# Altium PCB PCB1.PcbDoc
Units mm, origin at the board's own origin, x right, y up, seen from the top; angles counter-clockwise.
Board outline 150.27 x 119.51 mm, 2 copper layers (Top Layer, Bottom Layer); 61 components, 77 nets, 240 pads, 35 vias.
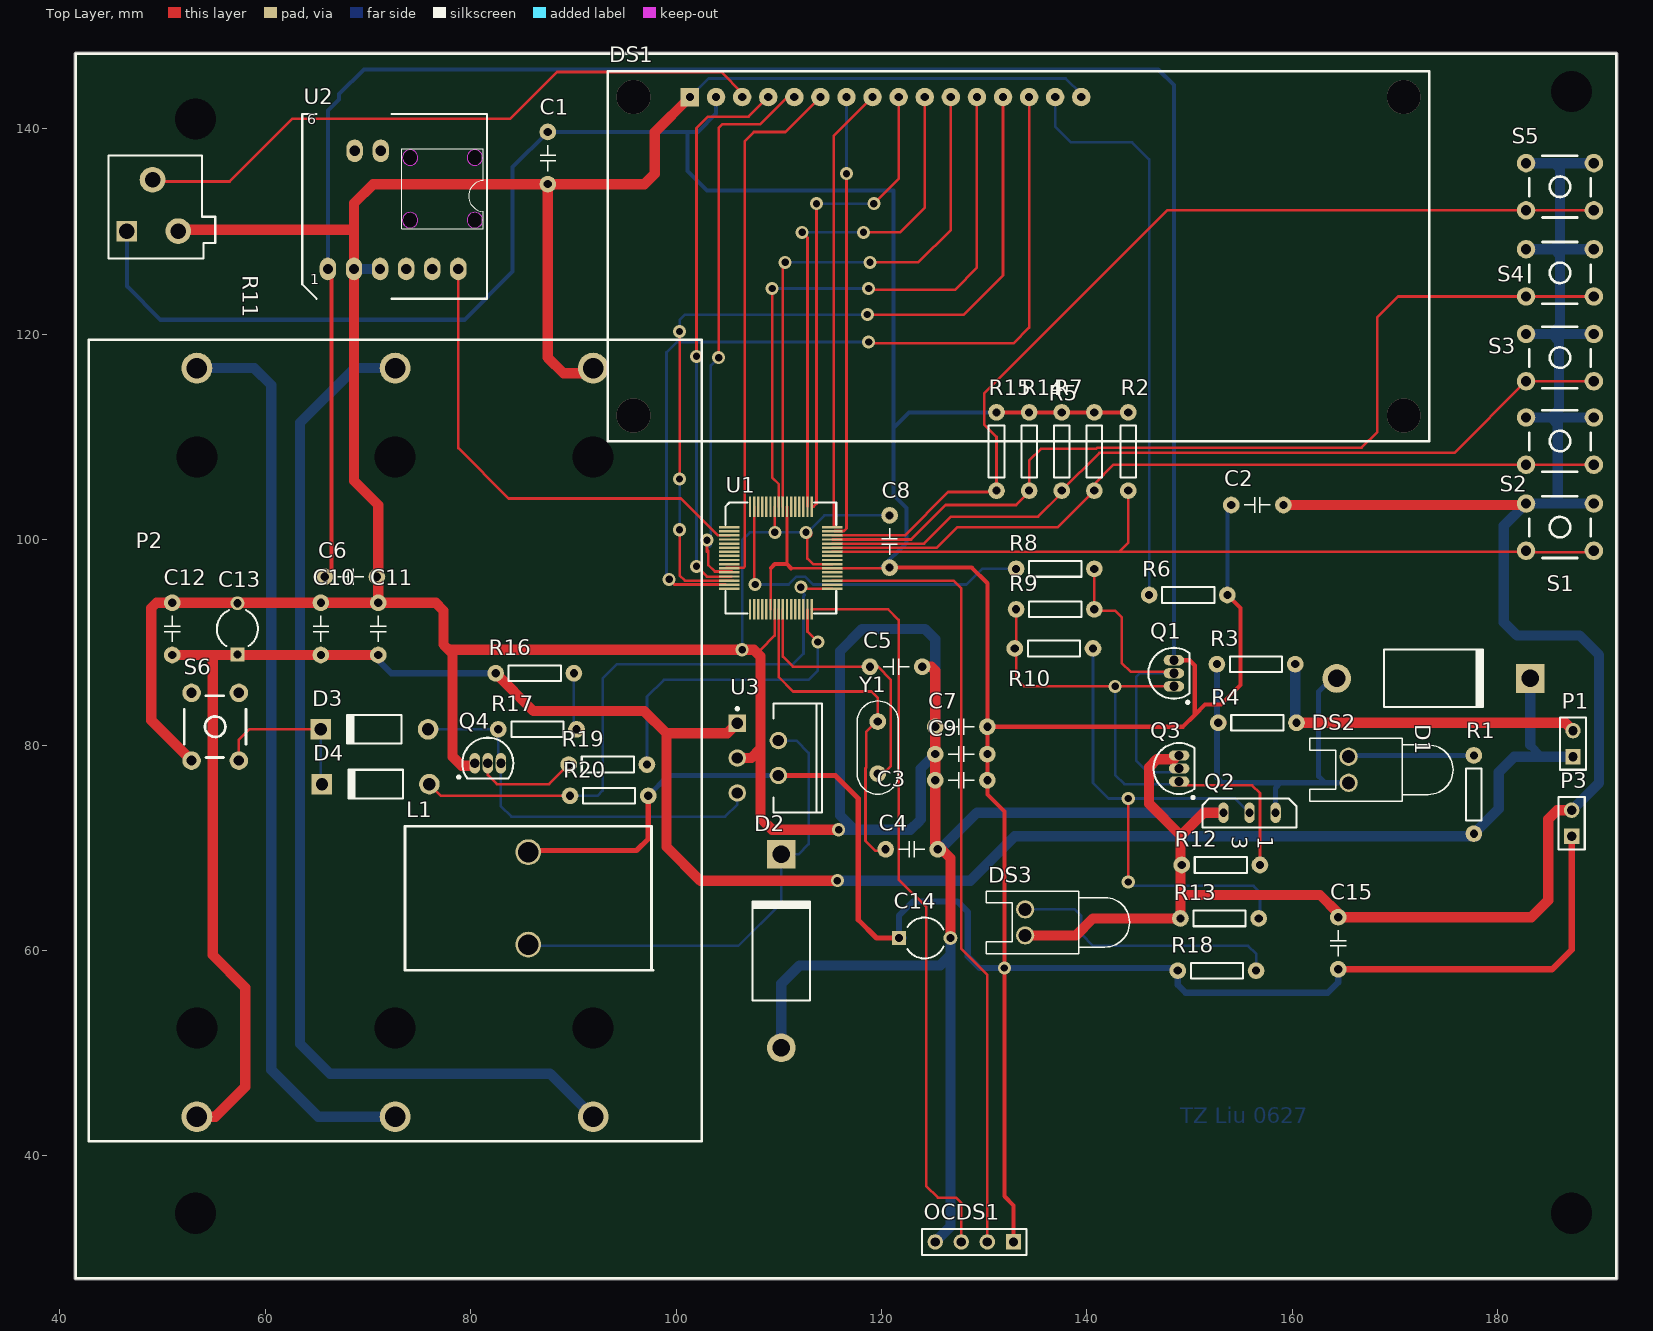
[diagram p0: Top Layer view]
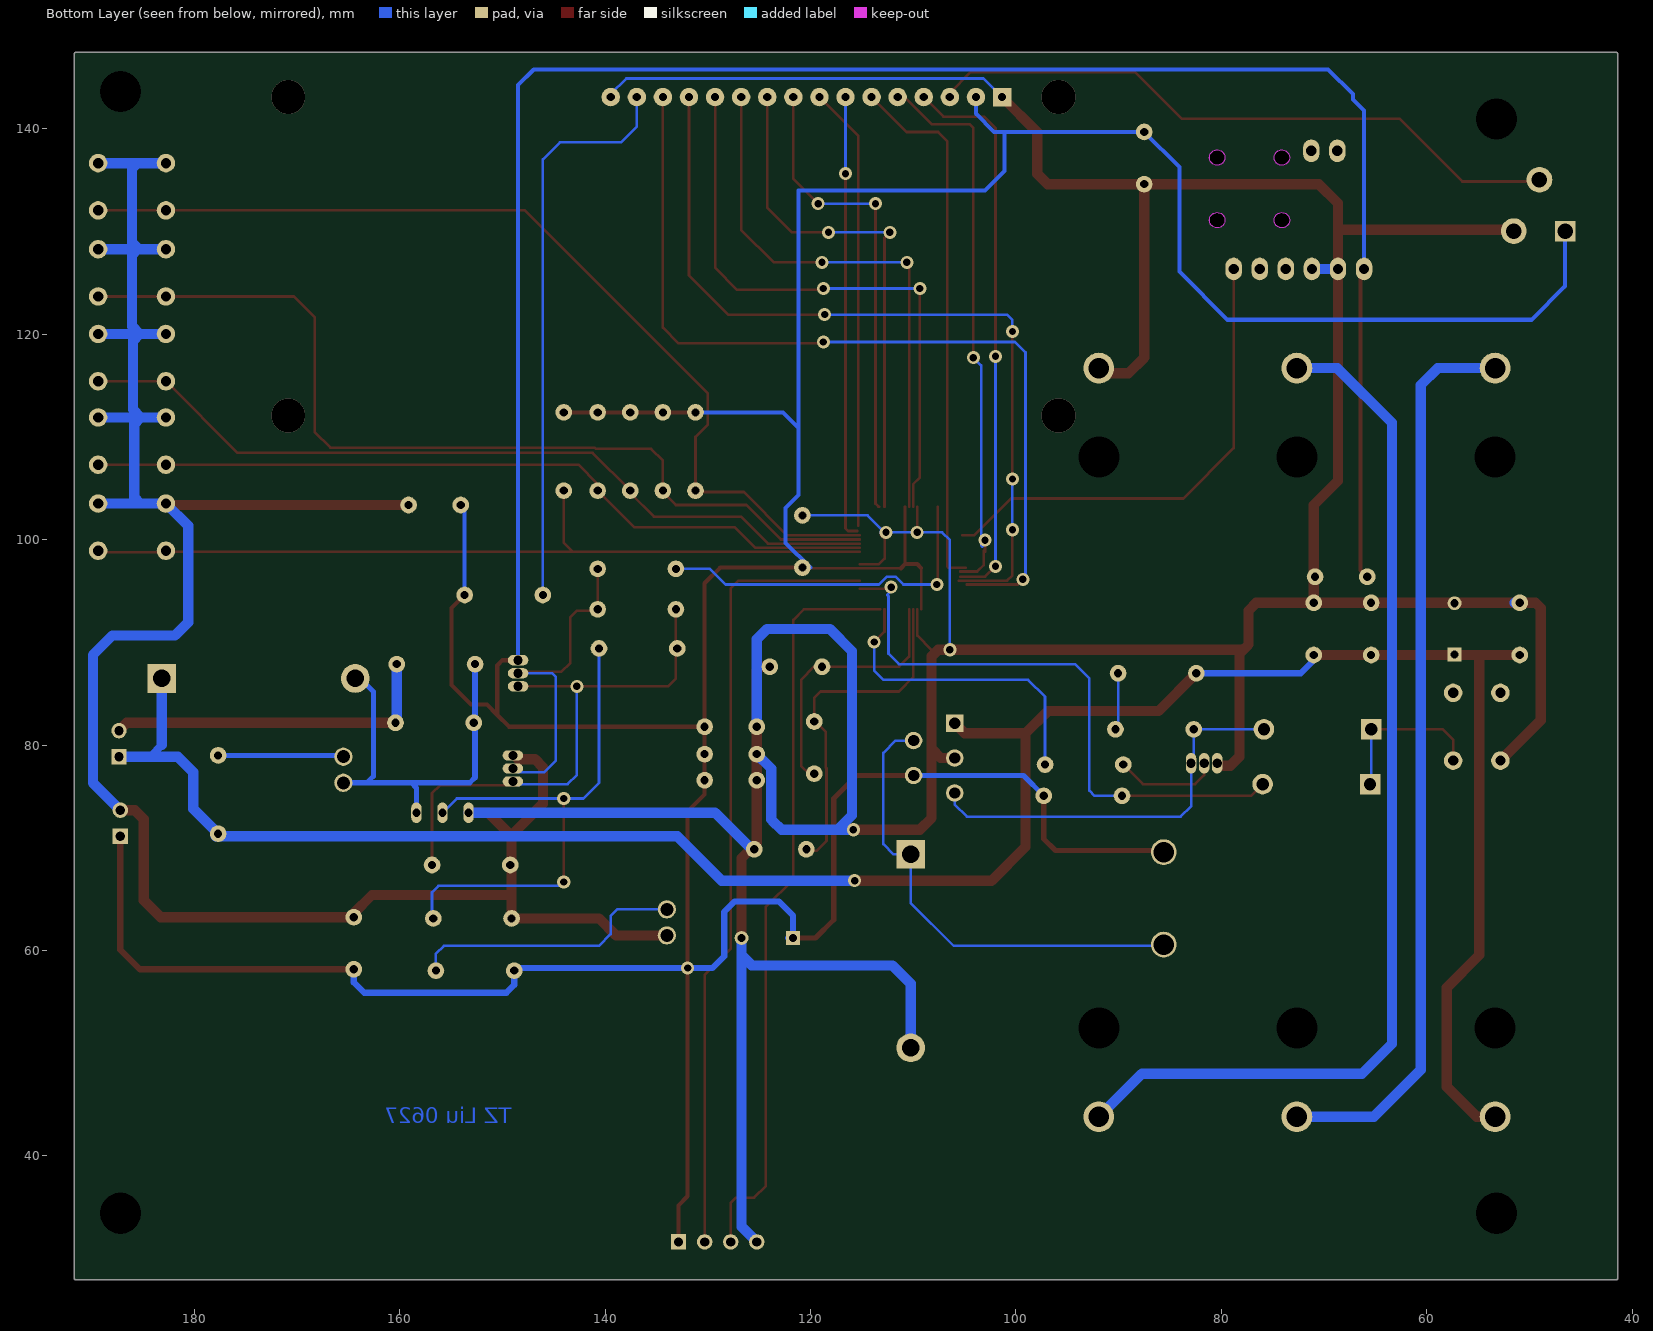
[diagram p1: Bottom Layer view, seen from below]

## Layer stack, top to bottom
Top Layer: signal copper 0.0356
Dielectric: dielectric 0.32, FR-4, Dk 4.8
Bottom Layer: signal copper 0.0356

## Board outline
41.529,27.94 cw(c41.529,28.067) 41.402,28.067 41.402,147.323 cw(c41.529,147.323) 41.529,147.45 191.473,147.45 cw(c191.473,147.323) 191.508,147.445 191.509,147.445 cw(c191.544,147.323) 191.671,147.323 191.671,28.067 cw(c191.544,28.067) 191.537,27.94 cw(c191.529,28.067) 191.529,27.94

## Design rules (kind name [scope] priority, off if disabled: settings)
Clearance [All] p1: gap=0.254
PolygonConnect [All] p1: connectstyle=Relief reliefconductorwidth=0.254 reliefentries=4 polygonreliefangle="90 Angle"
RoutingVias [All] p1: holewidth=0.711 width=1.27 viastyle="Through Hole" minholewidth=0.711 minwidth=1.27 maxholewidth=0.711 maxwidth=1.27
SilkscreenOverComponentPads [All] p1: minsilkscreentomaskgap=0.254
SolderMaskExpansion [All] p1: expansion=0.102
SupplyNets [All] p1: voltage=0.000
Width Width_1 [InNet('GND')] p1: maxlimit=1.2 minlimit=0.4 preferedwidth=1
Width [All] p2: maxlimit=0.75 minlimit=0.254 preferedwidth=0.6
27 further rules are at their usual default settings.

## Classes and differential pairs
component class Sheet1: C10 C11 C12 C13 C14 C15 D1 D2 D3 D4 DS2 DS3 L1 P1 P2 P3 Q1 Q2 Q3 Q4 R1 R2 R3 R4 R5 R7 R8 R9 R10 R12 R13 R14 R15 R16 R17 R18 R19 R20 S1 S2 S3 S4 S5 S6 U3
component class Sheet2: C1 C2 C3 C4 C5 C6 C7 C8 C9 DS1 OCDS1 R6 R11 U1 U2 Y1

## Components (designator, comment, footprint, x,y, rotation, side; value= is the part's Value field where it differs from the comment)
C1 "104" C200 87.503,137.16 r0 top
C2 "104" C200 156.591,103.378 r270 top
C3 "104" C200 127.762,76.581 r90 top
C4 "22p" C200 122.936,69.85 r270 top
C5 "22p" C200 121.412,87.63 r270 top
C6 "104" C200 68.326,96.393 r270 top
C7 "104" C200 127.762,81.788 r90 top
C8 "104" C200 120.777,99.822 r180 top
C9 "104" C200 127.762,79.121 r90 top
C10 "104" C200 65.405,91.313 r0 top
C11 "105" C200 70.993,91.313 r0 top
C12 "104" C200 50.927,91.313 r0 top
C13 "Cap2" CAPR5-4X5 57.277,91.313 r90 top
C14 "Cap2" CAPR5-4X5 124.206,61.214 r0 top
C15 "104" C200 164.465,60.706 r0 top
D1 "1N5824" DO-201AD 173.736,86.487 r0 top
D2 "1N5824" DO-201AD 110.236,59.944 r90 top
D3 "1N4001" DO-41 70.612,81.534 r180 top
D4 "1N4001" DO-41 70.739,76.2 r180 top
DS1 "WG14432B" LCM_16 93.345,109.601 r0 top
DS2 "LED" LED-0 165.481,77.597 r90 top
DS3 "LED" LED-0 133.985,62.738 r90 top
L1 "Inductor/80125" T080125 85.598,60.579 r90 top
OCDS1 "Header 4" HDR1X4 132.842,31.623 r180 top
P1 "Header 2" HDR1X2 187.325,78.867 r90 top
P2 "battery_set" BATTERY_SET 53.34,52.451 r90 top
P3 "Header 2" HDR1X2 187.198,71.12 r90 top
Q1 "2N3904" TO-92A 148.463,86.995 r0 top
Q2 "MOSFET-N" E3 156.083,73.406 r270 top
Q3 "2N3906" TO-92A 148.971,77.724 r0 top
Q4 "2N3904" TO-92A 81.661,78.232 r270 top
R1 "820R" AXIAL-0.3 177.673,75.184 r270 top
R2 "10k" AXIAL-0.3 144.018,108.585 r90 top
R3 "0.5R" AXIAL-0.3 156.464,87.884 r0 top
R4 "0.5R" AXIAL-0.3 156.591,82.169 r0 top
R5 "10k" AXIAL-0.3 140.716,108.585 r270 top
R6 "Res" AXIAL-0.3 149.86,94.615 r180 top
R7 "10k" AXIAL-0.3 137.541,108.585 r270 top
R8 "2K2" AXIAL-0.3 136.906,97.155 r180 top
R9 "1K" AXIAL-0.3 136.906,93.218 r0 top
R10 "100R" AXIAL-0.3 136.779,89.408 r180 top
R11 "Res Tap" VR3 50.038,130.175 r0 top
R12 "2K2" AXIAL-0.3 153.035,68.326 r180 top
R13 "2K2" AXIAL-0.3 152.908,63.119 r180 top
R14 "10k" AXIAL-0.3 134.366,108.585 r270 top
R15 "10k" AXIAL-0.3 131.191,108.585 r270 top
R16 "2K7" AXIAL-0.3 86.233,86.995 r180 top
R17 "470R" AXIAL-0.3 86.487,81.534 r0 top
R18 "4K7" AXIAL-0.3 152.654,58.039 r180 top
R19 "2K7" AXIAL-0.3 93.345,78.105 r180 top
R20 "10K" AXIAL-0.3 93.472,75.057 r180 top
S1 "SW-PB" TACK6 186.055,101.219 r180 top
S2 "SW-PB" TACK6 186.055,109.601 r180 top
S3 "SW-PB" TACK6 186.055,117.729 r180 top
S4 "SW-PB" TACK6 186.055,125.984 r180 top
S5 "SW-PB" TACK6 186.055,134.366 r180 top
S6 "SW-PB" TACK6 55.118,81.788 r90 top
U1 "HT66F2390" LFPQ-64 107.188,93.218 r0 top
U2 "PresSen_200Kpa" RSCM17100Kxxxx 74.041,132.461 r0 top
U3 "LM2596T-5.0" T05D 107.95,78.74 r270 top
Y1 "XTAL" XTAL4-8 119.634,79.756 r270 top

## Footprints (in the part's own frame and the unit in brackets; to place one, negate y for a bottom-side part, rotate by r counter-clockwise, add the part's x,y. Pads: shape width x height; smd on the part's side, far side on the other; paste and mask are expansions set on the pad)
AXIAL-0.3 [mil] "0.3\" Resistor; 2 Leads"
  round 64 hole 31.5: 1(-150,0) 2(150,0)
  silkscreen extent -100,-30 100,30, body extent -161,-39 165,39, height 86
BATTERY_SET [mm]
  round 3 hole 2: 1(-8.64,0) 2(-8.64,-19.29) 3(-8.64,-38.58) 4(64.26,-38.58) 5(64.26,-19.29) 6(64.26,0)
  round 0 hole 4: 7(0,0) 8(0,-19.29) 9(0,-38.58) 10(55.61,0) 11(55.62,-19.29) 12(55.62,-38.58)
  silkscreen extent -11.04,-49.13 67.02,10.56
C200 [mil] "鹅?"
  round 64 hole 31.5: 1(0,100) 2(0,-100)
  silkscreen extent -30,-50 30,50, body extent -41,-136 39,135, height 354
CAPR5-4X5 [mm] "Capacitor; 2 Leads"
  rect 1.35x1.35 hole 0.8: 1(-2.5,0)
  round 1.35 hole 0.8: 2(2.5,0)
  silkscreen extent -1.69,-2 1.82,2
DO-41 [mm] "Diode, Axial; Body 5.2 x 2.7 mm (LxDia. max), Lead Dia. 0.86 mm (max)"
  round 2 hole 1.2: 1(-5.23,0)
  rect 2x2 hole 1.2: 2(5.23,0)
  silkscreen extent -2.65,-1.41 2.75,1.4
DO-201AD [mm] "Diode, Axial; Body 9.5 x 5.6 mm (LxDia. max), Lead Dia. 1.32 mm (max)"
  round 2.8 hole 1.7: 1(-9.42,0)
  rect 2.8x2.8 hole 1.7: 2(9.42,0)
  silkscreen extent -4.8,-2.8 4.9,2.8
E3 [mm] "TO, Flat Index; 3 In-Line, Axial Leads; Body Dia. 4.6mm; Lead Dia. 0.5 mm (max)"
  oval 2x1 hole 0.8: 1(0,2.286) 2(0,-0.254) 3(0,-2.794)
  silkscreen extent -1.41,-4.83 1.41,4.32
HDR1X2 [mm] "Connector; Header; 2 Position"
  rect 1.5x1.5 hole 0.9: 1(0,0)
  round 1.5 hole 0.9: 2(2.54,0)
  silkscreen extent -1.27,-1.27 3.81,1.27
HDR1X4 [mm] "Connector; Header; 4 Position"
  rect 1.5x1.5 hole 0.9: 1(0,0)
  round 1.5 hole 0.9: 2(2.54,0) 3(5.08,0) 4(7.62,0)
  silkscreen extent -1.27,-1.27 8.89,1.27
LCM_16 [mm]
  rect 1.8x1.8 hole 0.8: 1(8,33.5)
  round 1.8 hole 0.8: 2(10.54,33.5) 3(13.08,33.5) 4(15.62,33.5) 5(18.16,33.5) 6(20.7,33.5) 7(23.24,33.5) 8(25.78,33.5) 9(28.32,33.5) 10(30.86,33.5) 11(33.4,33.5) 12(35.94,33.5) 13(38.48,33.5) 14(41.02,33.5) 15(43.56,33.5) 16(46.1,33.5)
  silkscreen extent 0,0 80,36, body extent 0.15,-0.03 79.95,36.14, height 12
LED-0 [mil] "LED; 2 Leads"
  round 70 hole 50: 1(50,0) 2(-50,0)
  silkscreen extent -120,-400 120,150
LFPQ-64 [mm]
  oval 0.23x2 smd: 1(0,0)
  rect 0.23x2 smd: 2(0.4,0) 3(0.8,0) 4(1.2,0) 5(1.6,0) 6(2,0) 7(2.4,0) 8(2.8,0) 9(3.2,0) 10(3.6,0) 11(4,0) 12(4.4,0) 13(4.8,0) 14(5.2,0) 15(5.6,0) 16(6,0) 33(6,10) 34(5.6,10) 35(5.2,10) 36(4.8,10) 37(4.4,10) 38(4,10) 39(3.6,10) 40(3.2,10) 41(2.8,10) 42(2.4,10) 43(2,10) 44(1.6,10) 45(1.2,10) 46(0.8,10) 47(0.4,10) 48(0,10)
  rect 2x0.23 smd: 17(8,2) 18(8,2.4) 19(8,2.8) 20(8,3.2) 21(8,3.6) 22(8,4) 23(8,4.4) 24(8,4.8) 25(8,5.2) 26(8,5.6) 27(8,6) 28(8,6.4) 29(8,6.8) 30(8,7.2) 31(8,7.6) 32(8,8) 49(-2,8) 50(-2,7.6) 51(-2,7.2) 52(-2,6.8) 53(-2,6.4) 54(-2,6) 55(-2,5.6) 56(-2,5.2) 57(-2,4.8) 58(-2,4.4) 59(-2,4) 60(-2,3.6) 61(-2,3.2) 62(-2,2.8) 63(-2,2.4) 64(-2,2)
  silkscreen extent -2.4,-0.4 8.4,10.4
RSCM17100Kxxxx [mm]
  oval 1.6x2.2 hole 1: 0(-0.33,-6.1) 0(2.21,-6.1) 1(-7.95,-6.1) 2(-5.41,-6.1) 3(-2.87,-6.1) 4(-2.81,5.4) 5(-5.35,5.4) 6(4.75,-6.1)
  Keep-Out Layer circle w0.1: c0.05,-1.35 r0.75
  Keep-Out Layer circle w0.1: c6.35,4.75 r0.75
  Keep-Out Layer circle w0.1: c6.35,-1.35 r0.75
  Keep-Out Layer circle w0.1: c0.05,4.75 r0.75
  Keep-Out Layer board cut-out: -0.706,4.75 -0.681,4.554 -0.605,4.372 -0.485,4.215 -0.328,4.095 -0.146,4.019 0.05,3.994 0.05,3.994 0.246,4.019 0.428,4.095 0.585,4.215 0.705,4.372 0.781,4.554 0.806,4.75 0.806,4.75 0.781,4.946 0.705,5.128 0.585,5.285 0.428,5.405 0.246,5.481 0.05,5.506 0.05,5.506 -0.146,5.481 -0.328,5.405 -0.485,5.285 -0.605,5.128 -0.681,4.946 -0.706,4.75
  Keep-Out Layer board cut-out: 5.594,-1.35 5.619,-1.546 5.695,-1.728 5.815,-1.885 5.972,-2.005 6.154,-2.081 6.35,-2.106 6.35,-2.106 6.546,-2.081 6.728,-2.005 6.885,-1.885 7.005,-1.728 7.081,-1.546 7.106,-1.35 7.106,-1.35 7.081,-1.154 7.005,-0.972 6.885,-0.815 6.728,-0.695 6.546,-0.619 6.35,-0.594 6.35,-0.594 6.154,-0.619 5.972,-0.695 5.815,-0.815 5.695,-0.972 5.619,-1.154 5.594,-1.35
  Keep-Out Layer board cut-out: 5.594,4.75 5.619,4.554 5.695,4.372 5.815,4.215 5.972,4.095 6.154,4.019 6.35,3.994 6.35,3.994 6.546,4.019 6.728,4.095 6.885,4.215 7.005,4.372 7.081,4.554 7.106,4.75 7.106,4.75 7.081,4.946 7.005,5.128 6.885,5.285 6.728,5.405 6.546,5.481 6.35,5.506 6.35,5.506 6.154,5.481 5.972,5.405 5.815,5.285 5.695,5.128 5.619,4.946 5.594,4.75
  Keep-Out Layer board cut-out: -0.706,-1.35 -0.681,-1.546 -0.605,-1.728 -0.485,-1.885 -0.328,-2.005 -0.146,-2.081 0.05,-2.106 0.05,-2.106 0.246,-2.081 0.428,-2.005 0.585,-1.885 0.705,-1.728 0.781,-1.546 0.806,-1.35 0.806,-1.35 0.781,-1.154 0.705,-0.972 0.585,-0.815 0.428,-0.695 0.246,-0.619 0.05,-0.594 0.05,-0.594 -0.146,-0.619 -0.328,-0.695 -0.485,-0.815 -0.605,-0.972 -0.681,-1.154 -0.706,-1.35
  silkscreen extent -10.45,-9 7.55,9
T05D [mm] "TO, Thru-Hole, Vertical, Heatsink Mounted; 5 Bent Staggered Leads; Body 10.3x8.6x4.6mm, Pitch 1.7 mm"
  rect 1.7x1.7 hole 1.1: 1(-3.4,-2)
  round 1.7 hole 1.1: 2(-1.7,2) 3(0,-2) 4(1.7,2) 5(3.4,-2)
  silkscreen extent -5.3,-2.12 5.3,6.23, body extent -5.35,-2.31 5.35,6.28, height 21.1
T080125 [mm]
  round 2.5 hole 2: 1(0,0) 2(9,0)
  silkscreen extent -2.5,-12.15 11.5,12
TACK6 [mm]
  round 1.8 hole 1: 1(-3.3,2.3) 1(3.3,2.3) 2(-3.3,-2.3) 2(3.3,-2.3)
  silkscreen extent -3,-3 3,3, body extent -3,-3.01 3.08,3.04, height 8
TO-92A [mm] "TO, Flat Index; 3 In-Line, Axial Leads; Body Dia. 4.5mm; Leads 0.51 x 0.48 mm (max)"
  oval 2x1 hole 0.9: 1(0,-1.27) 2(0,0) 3(0,1.27)
  silkscreen extent -2.48,-2.95 1.5,2.48, body extent -2.5,-2.5 1.5,2.5, height 6.86
VR3 [mm] "Thru-Hole; 3 Leads"
  rect 2x2 hole 1.5: 1(-3.523,-0.127)
  round 2.5 hole 1.5: 2(1.477,-0.127) 3(-1.023,4.873)
  silkscreen extent -5.33,-2.79 5.08,7.24
XTAL4-8 [mil]
  round 64 hole 31.5: 1(-100,0) 2(100,0)
  silkscreen extent -179,-79 179,79, body extent -178,-80 192,79, height 157

## Part data
C1 C2 C3 C4 C5 C6 C7 C8 C9 C10 C11 C12 C15: library part Cap, "Capacitor"
C13 C14: "Capacitor"
D1 D2: library part "Diode 1N5408", "3 Amp Medium Power Silicon Rectifier Diode"
D3 D4: library part "Diode 1N4001", "1 Amp General Purpose Rectifier"
DS1: "LCD Module"
DS2 DS3: library part LED0, "Typical INFRARED GaAs LED"
L1: library part Inductor, "Inductor"
OCDS1: "Header, 4-Pin"
P1 P3: "Header, 2-Pin"
Q1 Q4: "NPN General Purpose Amplifier"
Q2: "N-Channel MOSFET"
Q3: "PNP General Purpose Amplifier"
R1 R2 R3 R4 R5 R7 R8 R9 R10 R12 R13 R14 R15 R16 R17 R18 R19 R20: library part Res, "Resistor"
R6: "Resistor"
R11: "Tapped Resistor"
S1 S2 S3 S4 S5 S6: "Switch"
U3: "SIMPLE SWITCHER?Power Converter 150 KHz 3A Step-Down Voltage Regulator, 5-pin TO-220"
Y1: "Crystal Oscillator"

## Free pads (board coordinates)
  round 0 hole 4: 1(53.213,140.97) 2(53.213,34.417) 3(187.198,143.637) 4(187.198,34.417)

## Via types
v1: diameter 1.27, hole 0.711, Top Layer to Bottom Layer, 31 vias
v2: diameter 3.3, hole 3.3, Top Layer to Bottom Layer, 4 vias

## Nets (pads, with @x,y where several pads share a name; then routed paths per layer and width w, separated by ;. In a path a pad name is that pad's centre, name@x,y a point inside that pad or via, vN(x,y) a via of type N, cw(c..) or ccw(c..) an arc to the next point about the centre after c; other vN are vias at no path point)
+12V: C10.2 C11.2 C12.2 C13.1 D1.2 P1.1 P2.1 R1.2 R16.2 U3.1 | length 224
  Top Layer w1: C12.2 54.864,88.773 ; P2.1 55.114,43.811 58.039,46.736 58.039,56.388 54.864,59.563 54.864,88.773 ; C11.2@70.739,88.646 70.612,88.773 C10.2 54.864,88.773 ; R16.2 86.106,83.312 96.901,83.312 99.06,81.153 ; U3.1 104.963,81.153 99.06,81.153 ; v1(115.697,66.802) 102.362,66.802 99.06,70.104 99.06,81.153
  Bottom Layer w0.5: C11.2@70.993,88.265 C11.2
  Bottom Layer w0.6: C11.2@70.993,88.265 72.263,86.995 R16.2
  Bottom Layer w0.75: 183.156,80.01 184.299,78.867
  Bottom Layer w1: v1(115.697,66.802) 128.651,66.802 132.969,71.12 R1.2@177.927,71.12 ; R1.2 180.086,73.787 180.086,77.343 181.61,78.867 184.299,78.867 P1.1 ; 183.156,80.01 D1.2
GND: C1.2 C2.1 C3.1 C4.1 C5.1 C6.1 C7.1 C8.2 C9.1 C10.1 C11.1 C12.1 C13.2 C14.2 C15.1 D2.1 DS1.1 DS1.16 DS3.2 OCDS1.4 P2.4 P3.2 Q2.3 Q3.3 Q4.1 R11.2 R12.2 R13.2 S1.2 S2.2 S3.2 S4.2 S5.2 S6.1@52.818,78.488 U1.7 U1.23 U1.42 U2.2 U2.3 U3.3 | length 702.4
  Top Layer w0.254: 108.204,89.281 109.588,90.665 U1.7 ; v1@109.588,100.724 U1.42 ; v1@112.776,100.584 112.776,98.171 113.329,97.618 U1.23
  Top Layer w1: C12.1@50.927,93.98 C12.1 ; R11.2 51.642,130.175 68.631,130.175 ; S6.1@52.818,78.488 48.895,82.411 48.895,93.345 49.403,93.853 C12.1 ; Q4.1 80.137,77.978 79.121,77.978 78.232,78.867 78.232,88.9 77.851,89.281 ; P2.4 91.414,116.205 89.027,116.205 87.503,117.729 C1.2 ; DS1.1 97.917,139.673 97.917,135.636 96.901,134.62 C1.2 ; U3.3 107.315,78.74 108.204,79.629 ; v1@109.588,100.724 v1(109.601,100.711) ; v1(112.649,100.711) v1@112.776,100.584 ; v1(115.824,71.755) 109.347,71.755 108.204,72.898 108.204,79.629 ; C5.1 124.841,87.63 125.222,87.249 C7.1 C9.1 C3.1 125.222,70.485 126.706,69.001 C14.2 ; DS3.2@133.731,61.214 DS3.2 138.938,61.468 140.589,63.119 R13.2 149.098,65.405 ; Q3.3@148.463,78.613 146.812,78.613 146.05,77.851 146.05,74.295 149.098,71.247 149.098,71.12 ; Q2.3 151.384,73.406 149.098,71.12 ; C2.1 182.614,103.378 S1.2@182.755,103.519 ; P3.2 185.801,73.66 184.912,72.771 184.912,64.897 183.261,63.246 C15.1 164.465,63.627 162.687,65.405 149.098,65.405 ; C12.1 C10.1 C11.1 ; 68.631,130.175 68.631,132.766 70.485,134.62 C1.2 ; 68.631,130.175 U2.2 68.631,105.74 70.993,103.378 C11.1 ; C11.1 76.581,93.853 77.343,93.091 77.343,89.789 77.851,89.281 ; 77.851,89.281 v1(106.426,89.281) 107.569,89.281 108.204,88.646 108.204,79.629 ; 149.098,65.405 149.098,71.12
  Bottom Layer w0.254: DS1.1 103.151,144.907 137.922,144.907 DS1.16@139.445,143.384 ; v1(106.426,89.281) 106.426,99.949 107.188,100.711 v1(109.601,100.711) v1(112.649,100.711) ; v1@112.776,100.711 114.427,102.362 C8.2
  Bottom Layer w1: C12.1 C12.1@51.435,93.853 ; U2.2 U2.3 ; D2.1 110.236,56.769 112.014,58.547 125.73,58.547 126.706,59.523 ; v1(112.649,100.711) v1@112.776,100.711 ; v1(115.824,71.755) 122.809,71.755 123.698,72.644 ; 117.221,71.882 115.951,73.152 115.951,89.154 118.11,91.313 124.206,91.313 125.222,90.297 C7.1 ; 123.825,72.771 123.825,77.724 C9.1 ; OCDS1.4 126.706,33.107 126.706,59.523 ; C4.1 125.73,69.85 129.286,73.406 Q2.3 ; C14.2 126.706,59.523 ; DS1.16 DS1.16@139.445,143.384 ; S2.2@182.755,111.901 185.18,111.901 ; S3.2@182.755,120.029 185.307,120.029 ; S4.2@182.755,128.284 185.42,128.284 ; S5.2@182.755,136.666 185.533,136.666 ; P3.2 189.865,76.327 189.865,88.773 187.96,90.678 181.864,90.678 180.594,91.948 180.594,101.358 182.755,103.519 185.236,103.519 ; S1.2@189.355,103.519 185.236,103.519 ; S2.2@189.355,111.901 185.18,111.901 ; S3.2@189.355,120.029 185.307,120.029 ; S4.2@189.355,128.284 185.533,128.284 ; S5.2@189.355,136.666 185.533,136.666 ; 185.18,111.901 185.956,112.677 185.956,119.38 185.307,120.029 ; 185.18,111.901 185.829,111.252 185.829,104.112 185.236,103.519 ; 185.307,120.029 186.055,120.777 186.055,127.762 185.533,128.284 ; 185.42,128.284 185.533,128.284 ; 185.42,128.284 186.055,128.919 186.055,136.144 185.533,136.666
NetD1_1: D1.1 DS2.2 Q2.1 R3.1 R4.1 | length 38.8
  Top Layer w0.6: R4.1 R4.1@153.289,82.169
  Bottom Layer w0.5: 152.654,76.835 153.162,76.327 158.877,76.327 ; Q2.1 158.369,75.819 158.877,76.327 ; D1.1@163.83,86.487 162.56,85.217 162.56,76.962 163.195,76.327 ; DS2.2 163.195,76.327 ; 158.877,76.327 163.195,76.327
  Bottom Layer w0.6: 152.654,76.835 152.654,82.042 R4.1 152.654,82.296 R3.1
NetD2_2: D2.2 L1.1 U3.2 | length 46.6
  Bottom Layer w0.254: L1.1 85.725,60.452 106.045,60.452 110.236,64.643 D2.2 111.909,69.364 112.903,70.358 112.903,79.248 111.711,80.44 U3.2
NetD3_1: D3.1 Q4.3 R17.1 U3.5 | length 40.2
  Bottom Layer w0.254: D3.1@76.327,81.049 D3.1 R17.1 82.677,78.486 Q4.3 82.931,74.041 83.947,73.025 104.775,73.025 105.95,74.2 U3.5
NetD3_2: D3.2 D4.2 S6.2@57.418,78.488 | length 15.8
  Top Layer w0.254: S6.2@57.418,78.488 57.418,80.532 58.42,81.534 D3.2
  Bottom Layer w0.254: D3.2 65.382,76.327 D4.2
NetDS1_3: DS1.3 R11.3 | length 63.2
  Top Layer w0.254: R11.3 49.189,134.874 56.515,134.874 62.611,140.97 83.82,140.97 88.392,145.542 104.394,145.542 106.425,143.511 DS1.3
NetDS1_15: DS1.15 R6.2 | length 56.4
  Top Layer w0.254: R6.2 R6.2@146.05,95.25
  Bottom Layer w0.254: DS1.15 136.905,140.209 138.43,138.684 144.399,138.684 146.05,137.033 R6.2
NetDS2_1: DS2.1 R1.1 | length 12.1
  Bottom Layer w0.5: DS2.1@165.608,78.994 R1.1
NetDS3_1: DS3.1 R18.1 | length 27
  Bottom Layer w0.254: DS3.1 138.811,64.008 139.446,63.373 139.446,61.595 140.589,60.452 155.702,60.452 156.464,59.69 R18.1
NetP1_2: P1.2 R3.2 R4.2 | length 32.8
  Top Layer w1: R4.2 186.563,82.169 P1.2
  Bottom Layer w1: R4.2@160.274,82.296 R3.2
NetP2_2: P2.2 P2.6 | length 88.5
  Bottom Layer w1: P2.6 58.93,116.711 60.579,115.062 60.579,48.387 65.155,43.811 P2.2
NetP2_3: P2.3 P2.5 | length 103.4
  Bottom Layer w1: P2.5 68.705,116.711 63.373,111.379 63.373,50.927 66.294,48.006 87.725,48.006 P2.3
NetQ1_1: Q1.1 Q3.1 R9.1 R10.2 R12.1 | length 52.8
  Top Layer w0.254: R10.2 133.096,89.281 133.096,86.487 133.858,85.725 v1(142.748,85.725) Q1.1 ; R10.2@133.096,89.535 R9.1 ; Q3.1@148.463,76.073 156.083,76.073 156.845,75.311 R12.1
  Bottom Layer w0.254: v1(142.748,85.725) 142.748,77.089 143.637,76.2 148.336,76.2 Q3.1@148.463,76.073
NetQ1_2: Q1.2 Q3.2 R8.1 R9.2 | length 33
  Top Layer w0.254: R8.1 R9.2 140.843,93.091 142.748,93.091 143.383,92.456 143.383,88.011 144.272,87.122 148.336,87.122 Q1.2
  Bottom Layer w0.254: Q3.2@148.463,77.343 145.923,77.343 144.78,78.486 144.78,86.614 145.161,86.995 Q1.2
NetQ2_2: Q2.2 R10.1 R13.1 | length 53.5
  Top Layer w0.254: v1(144.018,66.675) v1(144.018,74.803)
  Bottom Layer w0.254: R10.1 140.589,76.327 142.113,74.803 v1(144.018,74.803) 154.432,74.803 Q2.2 ; v1(144.018,66.675) 144.399,66.294 156.21,66.294 156.845,65.659 156.845,63.246 R13.1
NetQ4_2: Q4.2 R19.2 | length 10.2
  Top Layer w0.254: Q4.2 81.661,77.089 82.55,76.2 87.63,76.2 R19.2
NetR16_1: R16.1 R17.2 | length 5.6
  Bottom Layer w0.254: R16.1 90.043,81.788 R17.2
PA0: OCDS1.2 U1.19 | length 77.7
  Top Layer w0.254: U1.19 126.994,96.018 127.762,95.25 127.762,60.158 130.302,57.618 OCDS1.2@130.302,31.496
PA1: R19.1 U1.15 | length 30.7
  Top Layer w0.254: U1.15 112.788,91.047 v1(113.792,90.043)
  Bottom Layer w0.254: R19.1 97.155,84.709 98.806,86.36 112.903,86.36 113.792,87.249 v1(113.792,90.043)
PA2: OCDS1.3 U1.16 | length 73
  Top Layer w0.254: U1.16 120.65,93.218 121.666,92.202 121.666,66.929 124.333,64.262 124.333,37.084 125.476,35.941 127.254,35.941 127.762,35.433 OCDS1.3
PA3: D4.1 R20.2 U1.17 | length 58.8
  Top Layer w0.254: D4.1 77.112,75.057 R20.2 ; v1@112.141,95.123 112.395,95.123 112.49,95.218 U1.17
  Bottom Layer w0.254: R20.2 92.329,75.057 92.837,75.565 92.837,86.487 94.234,87.884 111.379,87.884 112.395,88.9 112.395,94.488 112.522,94.615 112.141,94.996 v1(112.141,95.377)
PA4: U1.18
PA5: U1.14
PA6/RX0: U1.20
PA7/TX0: U1.21
PB0: U1.64
PB1: U1.1
PB2: U1.2
PB3: U1.3
PB4: U1.4
PB5: U1.5
PB6: C4.2 U1.8 Y1.1 | length 34
  Top Layer w0.254: U1.8 109.988,86.608 111.379,85.217 118.999,85.217 119.634,84.582 Y1.1 119.507,82.296 118.491,81.28 118.491,77.812 118.44,77.761 118.44,70.663 119.38,69.723 120.269,69.723 C4.2
PB7: C5.2 U1.9 Y1.2 | length 26
  Top Layer w0.254: U1.9 110.388,88.621 111.379,87.63 C5.2 119.634,87.63 120.904,86.36 120.904,77.978 120.142,77.216 Y1.2
PC0: U1.43
PC1: U1.44
PC2: U1.45
PC3: U1.46
PC4: R8.2 U1.47 | length 34.3
  Top Layer w0.254: U1.47 107.588,95.739 v1(107.696,95.631)
  Bottom Layer w0.254: v1(107.696,95.631) 110.958,95.631 111.72,96.393 112.562,96.393 113.324,95.631 128.27,95.631 129.794,97.155 R8.2
PC5: U1.48
PC6: U1.49
PC7: U1.50
PD0: U1.51 U2.6 | length 47.4
  Top Layer w0.254: U2.6 78.791,108.915 83.693,104.013 100.457,104.013 104.052,100.418 U1.51
PD1/RX1: U1.52
PD2//TX1: U1.53
PD3: U1.54
PD4: DS1.6 U1.59 | length 52.4
  Top Layer w0.254: U1.59@104.902,97.282 106.553,97.282 106.68,97.409 106.68,138.811 107.569,139.7 110.644,139.7 DS1.6
PD5: DS1.5 U1.60 | length 55.8
  Top Layer w0.254: v1(102.997,99.949) 102.997,98.806 103.124,98.933 103.124,97.536 103.759,96.901 U1.60@105.41,96.901 ; v1(104.14,117.729) 104.14,140.081 104.521,140.462 108.204,140.462 110.843,143.101 DS1.5
  Bottom Layer w0.254: v1(102.997,99.949) 102.997,99.568 103.251,99.314 103.378,99.441 103.378,116.967 v1(104.14,117.729)
PD6: DS1.4 U1.61 | length 54.8
  Top Layer w0.254: v1(101.981,97.409) 102.997,96.393 U1.61@105.41,96.393 ; v1(101.981,117.856) 101.981,140.081 103.097,141.197 107.061,141.197 DS1.4
  Bottom Layer w0.254: v1(101.981,97.409) v1(101.981,117.856)
PE0: R2.1 S1.1 U1.26 | length 80.5
  Top Layer w0.254: U1.26 143.141,98.818 ; R2.1 144.018,99.695 143.141,98.818 ; S1.1@189.355,98.792 182.755,98.792 182.654,98.818 143.141,98.818
PE1: R5.2 S2.1 U1.27 | length 77.9
  Top Layer w0.254: U1.27 125.38,99.218 127.381,101.219 137.16,101.219 R5.2 140.716,105.41 142.607,107.301 182.755,107.301 S2.1@189.355,107.301
PE2: R7.2 S3.1 U1.28 | length 80.9
  Top Layer w0.254: U1.28 124.129,99.618 126.746,102.235 135.255,102.235 137.541,104.521 R7.2 141.224,108.458 175.784,108.458 182.755,115.429 S3.1@189.355,115.429
PE3: R14.2 S4.1 U1.29 | length 92.3
  Top Layer w0.254: U1.29 122.878,100.018 126.238,103.378 133.096,103.378 134.366,104.648 R14.2 134.366,107.696 135.509,108.839 140.887,108.839 141.014,108.966 166.751,108.966 168.275,110.49 168.275,121.666 170.293,123.684 182.755,123.684 S4.1@189.355,123.684
PE4: R15.2 S5.1 U1.30 | length 94.5
  Top Layer w0.254: U1.30 122.262,100.418 126.492,104.648 131.064,104.648 R15.2 131.191,110.007 129.997,111.201 129.997,114.249 147.814,132.066 182.755,132.066 S5.1@189.355,132.066
PF0: DS1.7 U1.31 | length 43.3
  Top Layer w0.254: U1.31@115.443,100.84 116.332,100.84 116.585,101.093 v1(116.585,135.637)
  Bottom Layer w0.254: v1(116.585,135.637) DS1.7
PF1: DS1.8 U1.32 | length 43.3
  Top Layer w0.254: 115.343,101.346 115.343,139.319 DS1.8
PF2: DS1.9 U1.33 | length 46.9
  Top Layer w0.254: U1.33@113.284,103.218 113.378,103.218 113.665,103.505 v1(113.665,132.715) ; v1(119.253,132.715) 121.665,135.127 DS1.9
  Bottom Layer w0.254: v1@113.411,132.715 v1(113.665,132.715) v1(119.253,132.715)
PF3: DS1.10 U1.34 | length 50.9
  Top Layer w0.254: v1(112.268,129.921) 112.788,129.401 U1.34 ; v1(118.237,129.921) 121.793,129.921 124.205,132.333 DS1.10
  Bottom Layer w0.254: v1@112.014,129.921 v1(112.268,129.921) v1(118.237,129.921)
PF4: DS1.11 U1.40 | length 54.2
  Top Layer w0.254: U1.40 110.388,126.771 v1(110.617,127) ; v1(118.872,127) 123.571,127 126.745,130.174 DS1.11
  Bottom Layer w0.254: v1(110.617,127) v1(118.872,127)
PF5: DS1.12 U1.41 | length 59.3
  Top Layer w0.254: v1(109.347,124.46) 109.347,106.045 109.988,105.404 U1.41 ; v1(118.745,124.46) 118.618,124.333 127.127,124.333 129.285,126.491 DS1.12
  Bottom Layer w0.254: v1(109.347,124.46) v1(118.745,124.46)
PF6: DS1.13 U1.62 | length 81.1
  Top Layer w0.254: v1@100.33,101.092 v1(100.33,100.965) 100.33,96.52 100.838,96.012 U1.62@105.537,96.012 ; v1(100.33,105.918) v1(100.33,120.269) ; v1(118.618,121.92) 128.016,121.92 131.825,125.729 DS1.13
  Bottom Layer w0.254: v1(100.33,100.965) v1(100.33,105.918) ; v1(100.33,120.269) 100.33,121.412 100.838,121.92 v1(118.618,121.92)
PF7: DS1.14 U1.63 | length 86.9
  Top Layer w0.254: v1(99.314,96.139) 99.822,95.631 U1.63@104.775,95.631 ; v1@118.491,119.126 132.842,119.126 134.365,120.649 DS1.14
  Bottom Layer w0.254: v1(99.314,96.139) 99.06,96.393 99.06,118.237 100.076,119.253 v1(118.745,119.253)
PG0/RX2: U1.38
PG1/TX2: U1.37
PG2: U1.36
PG3: U1.35
PG4: U1.10
PG5: U1.11
PG6: U1.12
PG7: U1.13
PH0: U1.24
PH1: U1.25
PH2: U1.55
PH3: U1.56
PH4: U1.57
PH5: U1.58
"VSYS 5V": C1.1 C2.2 C3.2 C6.2 C7.2 C8.1 C9.2 C14.1 C15.2 DS1.2 L1.2 OCDS1.1 P3.1 Q1.3 R2.2 R5.1 R6.1 R7.1 R11.1 R14.1 R15.1 R18.2 R20.1 U1.6 U1.22 U1.39 U2.1 U3.4 | length 646.7
  Top Layer w0.254: U1.6@109.22,93.218 109.22,97.238 ; 110.788,97.619 U1.39 ; 111.189,97.218 U1.22 C8.1@120.713,97.218
  Top Layer w0.4: C6.2 66.421,97.028 66.421,126.031 U2.1 ; 109.22,97.238 109.601,97.619 110.788,97.619 111.189,97.218 ; C8.1 128.778,97.282 130.302,95.758 C7.2 ; R15.1 R14.1 R7.1 R5.1 R2.2 ; OCDS1.1 132.842,35.179 131.953,36.068 131.953,73.533 130.302,75.184 C3.2 C9.2 C7.2 ; Q1.3 149.987,88.265 150.495,87.757 150.495,82.931 ; R6.1 154.94,93.345 154.94,85.852 153.035,83.947 151.511,83.947 150.495,82.931 ; C7.2 149.352,81.788 150.495,82.931
  Top Layer w0.5: L1.2 85.742,69.723 96.139,69.723 97.282,70.866 R20.1 ; U3.4 115.492,77.04 117.729,74.803 117.729,62.992 119.507,61.214 C14.1
  Top Layer w0.6: C15.2 185.293,58.166 187.198,60.071 P3.1
  Bottom Layer w0.4: R11.1 46.515,124.681 49.784,121.412 79.375,121.412 84.074,126.111 84.074,136.271 C1.1 101.092,139.7 ; U2.1 66.091,141.783 67.183,142.875 67.183,143.383 69.596,145.796 146.939,145.796 148.463,144.272 Q1.3 ; DS1.2 103.885,141.477 102.108,139.7 101.092,139.7 ; C8.1 120.015,97.282 122.428,99.695 122.428,103.099 121.158,104.369 121.158,110.871 ; R15.1 122.682,112.395 121.158,110.871 ; R6.1 153.67,102.997 C2.2 ; 101.092,139.7 101.092,135.89 102.997,133.985 121.158,133.985 121.158,110.871
  Bottom Layer w0.5: R20.1 99.265,77.04 U3.4
  Bottom Layer w0.6: C14.1@122.174,61.214 C14.1 121.706,63.413 123.063,64.77 127.381,64.77 128.397,63.754 128.397,59.436 129.54,58.293 148.59,58.293 R18.2 148.844,56.642 149.606,55.88 163.449,55.88 164.465,56.896 C15.2
  other v1: 131.953,58.293
pads on no net: P2.7 P2.8 P2.9 P2.10 P2.11 P2.12 S6.1@52.818,85.088 S6.2@57.418,85.088 U2.0 U2.4 U2.5
copper on no net:
  other v2: 95.845,112.101 170.845,112.101 95.845,143.101 170.845,143.101

## Other copper
Bottom Layer:
  text "TZ Liu 0627" at 149.098,43.18 h1.52

## Silkscreen, mask and mechanical layers (free items; w line width, h text height)
Top Overlay:
  lines w0.254: 191.473,147.323 41.529,147.323 41.529,28.067 191.529,28.067 ; 191.544,28.067 191.544,147.323

## Text inside footprints (layer, text, board x,y; h text height)
Q2: Top Overlay "3" at 154.12,71.131 h1.5 r270; Top Overlay "1" at 156.638,71.131 h1.5 r270
U2: Top Overlay "6" at 64.091,140.461 h1; Top Overlay "1" at 64.391,124.861 h1